# Altium PCB thietkehthongnhung.PcbDoc
Units mil, origin at the board's own origin, x right, y up, seen from the top; angles counter-clockwise.
Board outline 5560 x 3665 mil, 2 copper layers (Top Layer, Bottom Layer); 35 components, 54 nets, 147 pads, 6 vias.
Unrouted connection lines stored in the file: 6.
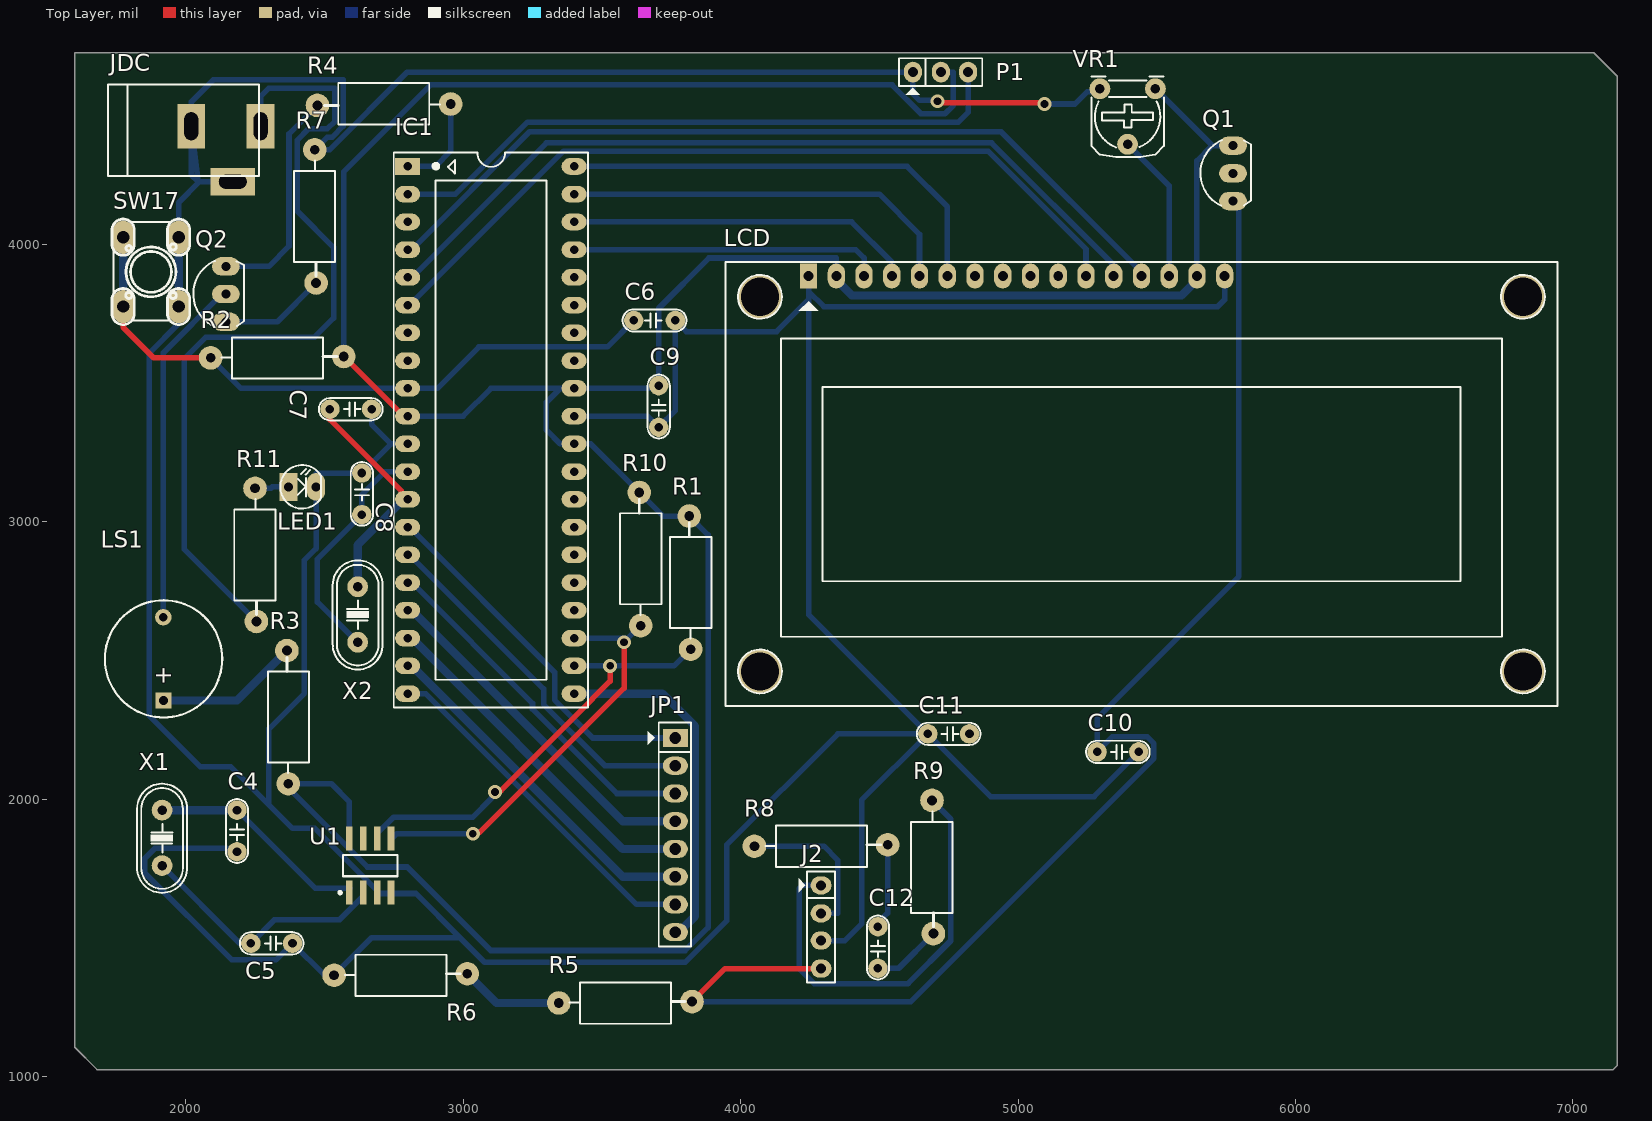
[diagram p0: Top Layer view]
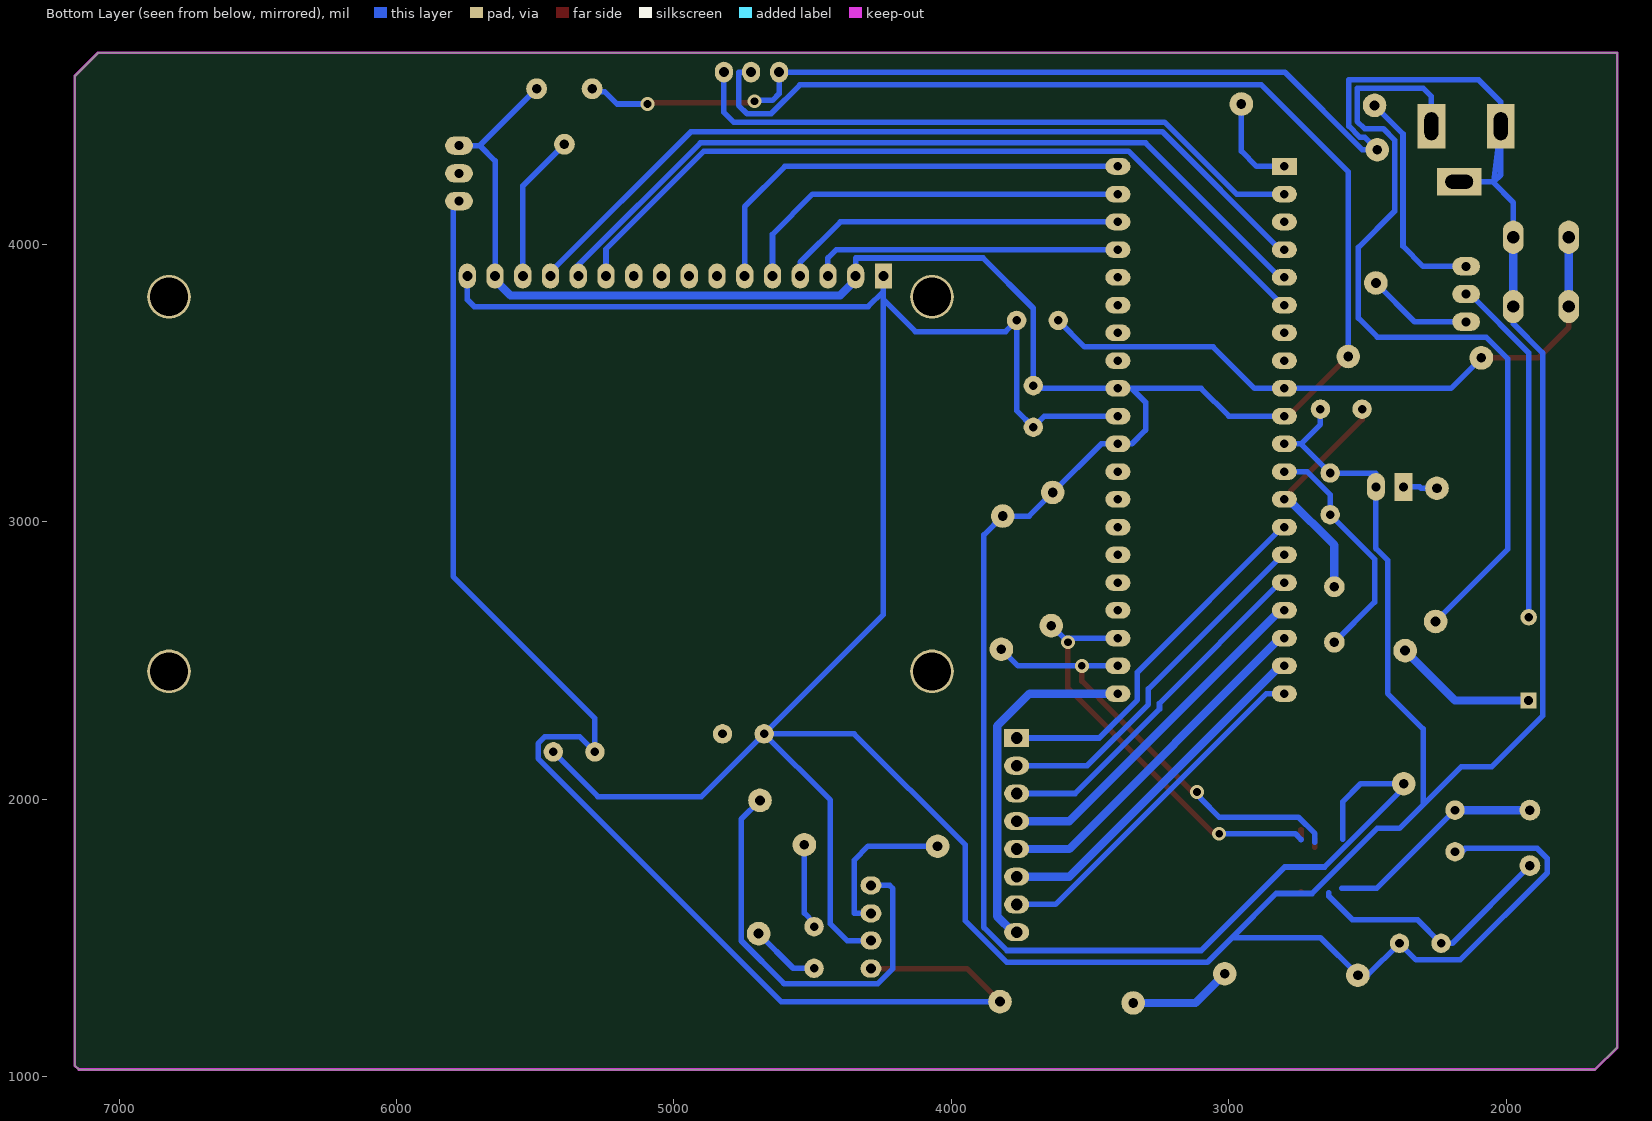
[diagram p1: Bottom Layer view, seen from below]
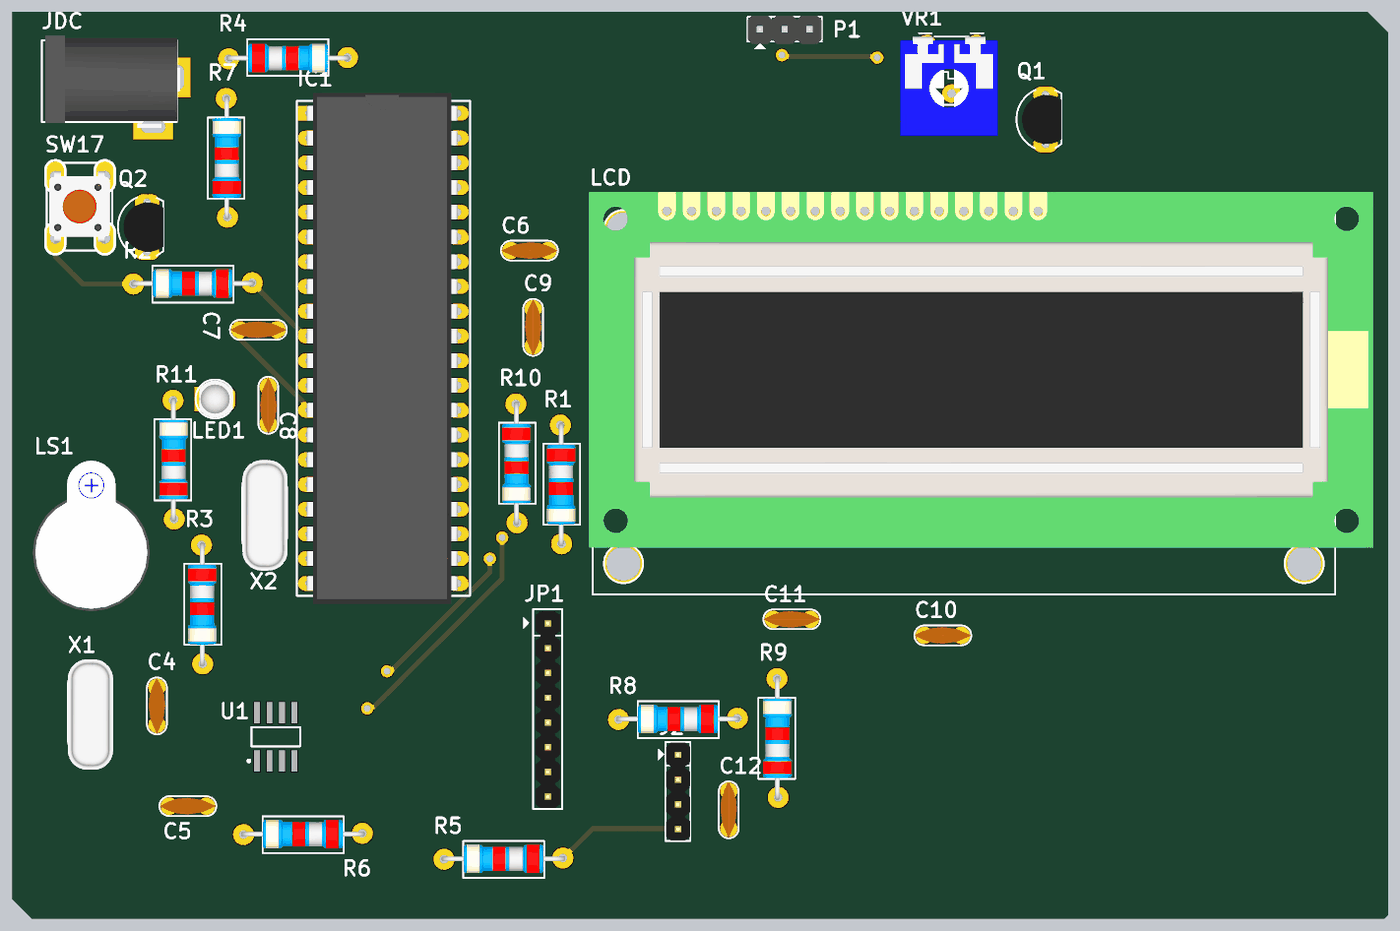
[diagram p2: 3D render of the assembled board from above, using the file's embedded part models]

## Layer stack, top to bottom
Top Solder: solder mask 0.4, Solder Resist, Dk 3.5
Top Layer: signal copper 1.4
Dielectric 1: dielectric 12.6, FR-4, Dk 4.8
Bottom Layer: signal copper 1.4
Bottom Solder: solder mask 0.4, Solder Resist, Dk 3.5

## Board outline
1600,1105 1680,1025 7145,1025 7160,1040 7160,4605 7075,4690 1600,4690

## Design rules (kind name [scope] priority, off if disabled: settings)
Clearance [All] p1: gap=10 ignorepadtopadclearanceinfootprint=FALSE
PolygonConnect [All] p1: connectstyle=Relief reliefconductorwidth=10 reliefentries=4 polygonreliefangle="90 Angle" airgapwidth=10
RoutingVias [All] p1: holewidth=28 width=50 viastyle="Through Hole" minholewidth=28 minwidth=50 maxholewidth=28 maxwidth=50
SolderMaskExpansion [All] p1: expansion=4 istentingtop=FALSE
SupplyNets "Schematic Supply Nets_1" [InNet('VCC')] p1: voltage=0.000
SupplyNets "Schematic Supply Nets" [InNet('GND')] p2: voltage=0.000
Width [All] p1: maxlimit=30 minlimit=20 preferedwidth=20 minimp=50.000000 maximp=50.000000 favimp=50.000000
30 further rules are at their usual default settings.

## Classes and differential pairs
component class Thietkehethongnhung: C4 C5 C6 C7 C8 C9 C10 C11 C12 IC1 J2 JDC JP1 LCD LED1 LS1 P1 Q1 Q2 R2 R3 R4 R5 R7 R8 R9 R11 SW17 U1 X1 X2

## Components (designator, comment, footprint, x,y, rotation, side; value= is the part's Value field where it differs from the comment)
C4 "22p" CN1.5 2185,1810 r90 top value=0.01uF
C5 "22p" CN1.5 2385,1480 r180 top value=0.01uF
C6 "1n" CN1.5 3615,3725 r0 top value=0.01uF
C7 "22p" CN1.5 2670,3405 r180 top value=0.01uF
C8 "22p" CN1.5 2635,3175 r270 top value=0.01uF
C9 "10u" CN1.5 3705,3340 r90 top value=0.01uF
C10 "10uF" CN1.5 5435,2170 r180 top
C11 "0.1uF" CN1.5 4825,2235 r180 top value=33pF
C12 "0.1uF" CN1.5 4495,1390 r90 top value=33pF
IC1 "ATMEL 16A" DIP40/W0.6 2800,4280 r270 top value="Atmega 16L"
J2 "LOADCELL" JP4 4290,1589 r270 top value="Jump Đơn Đực 2.54MM 1x40P Thẳng 11MM"
JDC "Jack DC5.5x2.1" DC-IN 2145,4325 r0 top
JP1 "2.54_8P" JP8 3765,2220 r270 top value="Jump Đơn Đực 2.54MM 1x40P Thẳng 11MM"
LCD "LCD16x2A" LCD16X2 4245,3885 r0 top
LED1 "LED" LED-3 2370,3125 r0 top value="LED 3 ly Single Colour"
LS1 "Speaker" SPEAKER 1920,2355 r90 top
P1 "SERVO90" JP3 4721,4620 r0 top
Q1 "S9015" TO92-123 5775,4255 r90 top value=C9015
Q2 "C458" TO92-123 2145,3820 r90 top value=C1815
R1 "10K" RES-1/2W 3820,2800 r270 top
R2 "10k" RES-1/2W 2350,3590 r180 top
R3 "100" RES-1/2W 2370,2315 r270 top
R4 "1k" RES-1/2W 2695,4505 r0 top
R5 "20K" RES-1/2W 3605,1265 r180 top
R6 "8.2k" RES-1/2W 2795,1365 r180 top
R7 "10K" RES-1/2W 2465,4080 r90 top
R8 "100" RES-1/2W 4310,1830 r180 top
R9 "100" RES-1/2W 4690,1735 r90 top
R10 "10K" RES-1/2W 3640,2885 r270 top
R11 "10k" RES-1/2W 2250,2860 r90 top
SW17 "SW" SW-RST 1775,4025 r90 top value="SW chip 2 pin"
U1 "DS1307ZN+T&R" SOIC-8 2665,1760 r90 top
VR1 "10K" VR 5495,4560 r180 top value="VR 10K"
X1 "32768Khz" XT2 1915,1860 r90 top value=4Mhz
X2 "8Mhz" XT2 2620,2665 r90 top value=4Mhz

## Footprints (in the part's own frame and the unit in brackets; to place one, negate y for a bottom-side part, rotate by r counter-clockwise, add the part's x,y. Pads: shape width x height; smd on the part's side, far side on the other; paste and mask are expansions set on the pad)
CN1.5 [mil]
  round 70 hole 31: 1(0,0) 2(150,0)
  silkscreen extent -40,-40 190,40, body extent -40,-33 190,33, height 235
DC-IN [mil] "Jac DC input"
  rect 100x160 hole 50 slot 100 at 90 deg: 1(125,100) 2(-125,100)
  rect 160x100 hole 50 slot 100 at 0 deg: 3(25,-100)
  silkscreen extent -425,-80 120,250, body extent -410,-105 134,269, height 434
DIP40/W0.6 [mil] "40 PIN, W 600mil, Pin to pin 100mil"
  rect 60x90 hole 31: 1(0,0)
  oval 60x90 hole 31: 2(100,0) 3(200,0) 4(300,0) 5(400,0) 6(500,0) 7(600,0) 8(700,0) 9(800,0) 10(900,0) 11(1000,0) 12(1100,0) 13(1200,0) 14(1300,0) 15(1400,0) 16(1500,0) 17(1600,0) 18(1700,0) 19(1800,0) 20(1900,0) 21(1900,600) 22(1800,600) 23(1700,600) 24(1600,600) 25(1500,600) 26(1400,600) 27(1300,600) 28(1200,600) 29(1100,600) 30(1000,600) 31(900,600) 32(800,600) 33(700,600) 34(600,600) 35(500,600) 36(400,600) 37(300,600) 38(200,600) 39(100,600) 40(0,600)
  silkscreen extent -50,-50 1950,650, body extent -82,-10 1982,600, height 224
JP3 [mil] "Jumper 3"
  oval 65x75 hole 36: 1(-100,0) 2(1,0) 3(99,0)
  silkscreen extent -150,-81 150,50, body extent -150,-60 150,55, height 355
JP4 [mil] "Jumper 4"
  oval 65x75 hole 36: 1(-100,0) 2(1,0) 3(99,0) 4(200,0)
  silkscreen extent -150,-81 250,50, body extent -148,-48 248,50, height 323
JP8 [mil] "JP8"
  rect 65x90 hole 42: 1(0,0)
  oval 65x90 hole 42: 2(100,0) 3(200,0) 4(300,0) 5(400,0) 6(500,0) 7(600,0) 8(700,0)
  silkscreen extent -56,-100 752,57, body extent -48,-50 748,48, height 323
LCD16X2 [mil] "LCD dipslay 16x2, 16 pin"
  rect 62x90 hole 36: 1(0,0)
  oval 62x90 hole 36: 2(100,0) 3(200,0) 4(300,0) 5(400,0) 6(500,0) 7(600,0) 8(700,0) 9(800,0) 10(900,0) 11(1000,0) 12(1100,0) 13(1200,0) 14(1300,0) 15(1400,0) 16(1500,0)
  round 157.48 hole 137.8: "Hole 0"(-175,-1425) "Hole 0"(-175,-75) "Hole 0"(2575,-1425) "Hole 0"(2575,-75)
  silkscreen extent -300,-1550 2700,50, body extent -315,-1360 2855,77, height 414
LED-3 [mil] "LED 2 PIN, 3ly Only colour"
  rect 65x100 hole 32: 1(0,0)
  oval 65x100 hole 32: 2(100,0)
  silkscreen extent -29,-78 118,79, body extent -13,-75 125,75, height 217
RES-1/2W [mil]
  round 85 hole 35: 1(-220,-5) 2(260,0)
  silkscreen extent -195,-74 221,75, body extent -230,-60 270,56, height 121
SOIC-8 [mm] "SOIC, 8-Leads, Body 5,0x4,0mm (max), Pitch 1,27mm, IPC Medium Density"
  rect 2.2x0.6 smd: 1(-2.475,1.905) 2(-2.475,0.635) 3(-2.475,-0.635) 4(-2.475,-1.905) 5(2.475,-1.905) 6(2.475,-0.635) 7(2.475,0.635) 8(2.475,1.905)
  silkscreen extent -2.6,-2.5 0.98,2.88, body extent -3.2,-2.5 3.2,2.5, height 1.75
SPEAKER [mm]
  rect 1.5x1.5 hole 0.8: 1(0,0)
  round 1.5 hole 0.8: 2(7.62,0.013)
  silkscreen extent -1.55,-5.38 9.18,5.36, body extent -2.22,-6 13.24,6, height 4.5
SW-RST [mil]
  oval 120x75 hole 44: 1(-250,0) 1(0,0) 2(-250,-200) 2(0,-200)
  silkscreen extent -315,-240 65,41, body extent -278,-220 34,24, height 276
TO92-123 [mil] "TO-92"
  oval 66x100 hole 32: 1(-100,0) 2(0,0) 3(100,0)
  silkscreen extent -117,-65 120,118, body extent -109,-66 109,95, height 245
VR [mil] "Resistor Variable"
  round 75 hole 35: 1(0,0) 2(100,200) 3(200,0)
  silkscreen extent -31,-44 231,246, body extent -87,-30 307,372, height 165
XT2 [mil] "Footpin for Crystal 2 pin"
  round 75 hole 34: 1(-100,0) 2(100,0)
  silkscreen extent -198,-90 195,90, body extent -233,-93 213,90, height 138

## Part data
C4 C5 C6 C7 C8 C9: library part CN1.5, "Cap np 682pF => 104pF"
C10 C11 C12: library part CN
IC1: library part ATmega16A-PU, "8-Bit AVR Microcontroller with 16K Bytes of In-System Programmable Flash Memory"
J2: library part "Jum Don Duc 2.54_4P", "Cắm", Chung_Loai=Cắm, Don_Vi=Con, Ma_Hang=MH000903
JDC: library part Jac_DC, "Cắm", Chung_Loai=Cắm, Don_Vi=Con, Ma_Hang=MH000923, Ten_Linh_Kien="Jack DC5.5x2.1MM DC5501"
JP1: library part "Jum Don Duc 2.54_8P", "Cắm", Chung_Loai=Cắm, Don_Vi=Con, Ma_Hang=MH000903
LCD: library part LCD16x2, "LCD dipslay 16 char, 2 line"
LED1: "LED Single colour Green and Red"
LS1: "Loudspeaker", LatestRevisionDate=17-Jul-2002, LatestRevisionNote="Re-released for DXP Platform.", PackageReference=PIN2, Published=24-Mar-1999, Publisher="Altium Limited"
P1: library part "Jum Don Duc 2.54_3P", "Cắm", Chung_Loai=Cắm, Don_Vi=Con, Ma_Hang=MH000903, Ten_Linh_Kien="Jump Đơn Đực 2.54MM 1x40P Thẳng 11MM"
Q1: library part S9013, "PNP 600mW, EBC"
Q2: "NPN 600mW, ECB"
R1 R2 R3 R4 R5 R6 R7 R8 R9 R10 R11: library part Res, "Res", Manufacturer="Generic Components", Class=Passive, Published=08/06/2000, Publisher="Altium Hobart Technology Centre", SubClass=R
SW17: library part SW2, "Switch button 2 pin"
U1: "IC RTC CLK/CALENDAR I2C 8-SOIC", Base Part Number=DS1307, Current - Timekeeping (Max)="200µA @ 5V", Manufacturer="Maxim Integrated", Operating Temperature="-40°C ~ 85°C", Package / Case="8-SOIC (0.154\", 3.90mm Width)", Supplier Device Package=8-SOIC, Supplier Part Number 1=DS1307ZN+T&RDKR-ND, Voltage - Supply="4.5 V ~ 5.5 V", Voltage - Supply, Battery="2 V ~ 3.5 V", Category="Integrated Circuits (ICs)", ComponentLink1Description=http://datasheets.maximintegrated.com/en/ds/DS1307.pdf, ComponentLink1URL=http://datasheets.maximintegrated.com/en/ds/DS1307.pdf, Date Format=YY-MM-DD-dd, Features="Leap Year, NVSRAM, Square Wave Output", Interface="I²C, 2-Wire Serial", Manufacturer Part Number=DS1307ZN+T&R, Memory Size=56B, Mounting Type="Surface Mount", Packaging=Digi-Reel®, Part Status=Active, Pricing 1="1=3.6, 10=3.392, 25=2.7132, 50=2.5776, 100=2.3741, 250=2.25196, 500=2.17056 (USD)", RoHS="RoHS Compliant", Stock 1=8457, Supplier 1=Digi-Key, Time Format="HH:MM:SS (12/24 hr)", Type=Clock/Calendar
VR1: library part VR1, "Var Resistor"
X1 X2: library part XT2, "Crystal, 32.768 KHz, -40 to 85 degC, 3.2 x 1.5 x 0.9 mm SMD"

## Via types
v1: diameter 50, hole 28, Top Layer to Bottom Layer, 6 vias

## Nets (pads, with @x,y where several pads share a name; then routed paths per layer and width w, separated by ;. In a path a pad name is that pad's centre, name@x,y a point inside that pad or via, vN(x,y) a via of type N, cw(c..) or ccw(c..) an arc to the next point about the centre after c; other vN are vias at no path point)
GND: C4.1 C5.1 C6.2 C7.1 C8.1 C9.1 C10.1 C11.2 IC1.11 IC1.31 J2.3 JDC.2 JDC.3 LCD.1 LCD.16 LED1.2 P1.1 R6.2 R7.2 SW17.2 U1.4 VR1.3 | length 20441.8
  Top Layer w20: U1.4 U1.4@2740,1665 ; v1(4710,4515) 4715,4510 5090,4510 v1(5095,4505)
  Bottom Layer w20: SW17.2@1975,3775 1975,3713.61 1869,3607.61 1869,2300 2053,2116 2163,2116 2300,1979 ; SW17.2@1975,4025 1975,4150 2050,4225 ; JDC.3 2050,4225 ; C4.1 2159.93,1810 2147.43,1822.5 1889.11,1822.5 1852.5,1785.89 1852.5,1734.11 2166.61,1420 2325,1420 C5.1 2500,1365 R6.2 2670,1500 2989,1500 ; C7.1 2670,3350 2740,3280 ; 2740,1660 2740.5,1659.5 ; IC1.11 2740,3280 ; IC1.31 3665,3380 C9.1 3765,3400 C6.2 3805,3685 4130,3685 4245,3800 ; LCD.1 4245,3830 ; J2.3 4375.96,1490 4435.96,1550 4435.96,1995.96 C11.2 ; v1(4710,4515) 4707,4518 4645,4518 4621,4542 P1.1 2798.66,4620 2518.66,4340 R7.2 2511,4386 2528.5,4386 2567.5,4425 2567.5,4592.5 2100,4592.5 2020,4512.5 JDC.2 ; v1(5095,4505) 5205,4505 5249.77,4549.77 5284.77,4549.77 VR1.3 ; C10.1 5274,2009 4901,2009 C11.2 ; LCD.16 5745,3800 5720,3775 4300,3775 4245,3830 ; JDC.2 2020,4250 2045,4225 ; JDC.2 2045,4225 ; 2045,4225 2050,4225 ; 2300,1979 2385,1894 2465.5,1894 2700,1659.5 2740.5,1659.5 ; 2300,1979 2300,2253 2428,2381 2428,2861 2470,2903 LED1.2 2470,3175 C8.1 2740,3280 ; 2740.5,1659.5 2829.5,1659.5 2989,1500 ; 2989,1500 3078,1411 3800,1411 3951,1562 3951,1835.5 4350.5,2235 C11.2 ; 4245,3800 4245,3830 ; 4245,3800 4245,2665 C11.2
  Bottom Layer w30: SW17.2@1975,3775 SW17.2@1975,4025
NetC4_2: C4.2 U1.1 X1.2 | length 795.2
  Bottom Layer w20: C4.2 2466.4,1678.6 2593.6,1678.6
  Bottom Layer w30: X1.2 C4.2
NetC5_2: C5.2 U1.2 X1.1 | length 924
  Bottom Layer w20: X1.1 2195,1480 C5.2 2320,1565 2555,1565 2640,1650 2640,1662.56
NetC7_2: C7.2 IC1.13 X2.2 | length 841.8
  Top Layer w20: C7.2 2520,3367.78 2777.35,3110.44 2777.35,3098.48 2795.82,3080 IC1.13
  Bottom Layer w30: X2.2 2620,2915 2785,3080 IC1.13
NetC8_2: C8.2 IC1.12 X2.1 | length 857.7
  Bottom Layer w20: X2.1 2475,2710 2475,2865 C8.2 2635,3097 2718,3180 IC1.12
NetC10_2: C10.2 J2.4 Q1.1 R5.1 | length 5051.9
  Top Layer w20: R5.1 3944,1389 J2.4
  Bottom Layer w20: R5.1 4614,1270 5490,2146 5490,2200 5465,2225 5340,2225 C10.2 5285,2291 5796,2802 5796,4155 Q1.1
NetC11_1: C11.1
NetC12_1: C12.1 R9.1 | length 251.8
  Bottom Layer w20: C12.1 4570,1390 R9.1
NetC12_2: C12.2 R8.1 | length 309.5
  Bottom Layer w20: C12.2 4495,1553.53 4530,1588.53 R8.1
NetJ2_1: J2.1 R9.2 | length 1539.1
  Bottom Layer w20: J2.1 4222.5,1689 4210.78,1677.28 4210.78,1388.97 4264.75,1335 4603.39,1335 4757.5,1489.11 4757.5,1927.5 R9.2
NetJ2_2: J2.2 R8.2 | length 572.7
  Bottom Layer w20: R8.2 4300,1830 4350,1780 4350,1588 J2.2
NetJDC_1: JDC.1 R11.1 | length 3019.8
  Bottom Layer w20: R11.1 1994.59,2900.41 1994.59,3586.41 2073.18,3665 2465,3665 2533,3733 2533,3988 2402.5,4118.5 2402.5,4375 2443.5,4416 2511,4416 2537.5,4442.5 2537.5,4562.5 2300,4562.5 2270,4532.5 JDC.1
NetLCD_14: LCD.14 VR1.2 | length 537.1
  Bottom Layer w20: VR1.2 5545,4210 LCD.14
NetLED1_1: LED1.1 R11.2 | length 122.1
  Bottom Layer w20: R11.2 2307,3120 2312,3125 LED1.1
NetLS1_1: LS1.1 R3.1 | length 519.6
  Bottom Layer w30: LS1.1 2185,2355 R3.1
NetLS1_2: LS1.2 Q2.2 | length 1266.7
  Bottom Layer w20: LS1.2 1919.5,3608.61 2130.89,3820 Q2.2
NetQ1_2: Q1.2
NetQ2_1: Q2.1 R7.1 | length 383
  Bottom Layer w20: Q2.1 2330,3720 R7.1
NetQ2_3: Q2.3 R4.1 | length 807.5
  Bottom Layer w20: Q2.3 2300,3920 2372.5,3992.5 2372.5,4397.5 R4.1
NetR5_2: R5.2 R6.1 | length 373.5
  Bottom Layer w30: R6.1 3120,1265 R5.2
PA0: IC1.40 LCD.6 | length 1655.1
  Bottom Layer w20: IC1.40 4600,4280 4745,4135 LCD.6
PA1: IC1.39 LCD.5 | length 1455.1
  Bottom Layer w20: IC1.39 4500,4180 4645,4035 LCD.5
PA2: IC1.38 LCD.4 | length 1255.1
  Bottom Layer w20: IC1.38 4400,4080 4545,3935 LCD.4
PA3: IC1.37 LCD.3 | length 1122.4
  Bottom Layer w20: IC1.37 4415,3980 4445,3950 LCD.3
PA4: IC1.36
PA5: IC1.35
PA6: IC1.34
PA7: IC1.33
PB0: IC1.1 R4.2 | length 347.8
  Bottom Layer w20: IC1.1 2900,4280 2955,4335 R4.2
PB1: IC1.2 P1.3 | length 2287.2
  Bottom Layer w20: IC1.2 2972,4180 3232,4440 4785,4440 4820,4475 P1.3
PB2: IC1.3
PB3: IC1.4 LCD.13 | length 3044.6
  Bottom Layer w20: IC1.4 2815,3980 3240,4405 4939,4405 5445,3899 LCD.13
PB4: IC1.5 LCD.12 | length 2968.1
  Bottom Layer w20: IC1.5 2815,3880 3300,4365 4905,4365 5345,3925 LCD.12
PB5: IC1.6 LCD.11 | length 2918.1
  Bottom Layer w20: IC1.6 2806.88,3780 3361.88,4335 4892,4335 5245,3982 LCD.11
PB6: IC1.7
PB7: IC1.8
PC0: IC1.22 R1.2 U1.6 | length 1635.4
  Top Layer w20: U1.6@2690,1825.95 U1.6 ; v1(3115,2025) 3120.74,2030.74 3136.45,2030.74 3465,2359.29 3465,2360 3530,2425 v1(3530,2480)
  Bottom Layer w20: 2690,1845 2690,1875 2750,1935 3035,1935 3101.11,2001.11 3101.11,2002.99 3115,2016.88 v1(3115,2025) ; IC1.22 v1(3530,2480) 3760,2480 R1.2
PC1: IC1.23 R10.2 U1.5 | length 1542.4
  Top Layer w20: U1.5 U1.5@2740,1888.94 ; v1(3035,1875) 3040.74,1880.74 3060.74,1880.74 3580,2400 v1(3580,2565)
  Bottom Layer w20: 2740,1854.17 2760.83,1875 v1(3035,1875) ; IC1.23 v1@3595,2580 ; v1(3580,2565) v1@3595,2580 ; R10.2 v1@3595,2580
PC2: IC1.24
PC3: IC1.25
PC4: IC1.26
PC5: IC1.27
PC6: IC1.28
PC7: IC1.29
PD0: IC1.14 JP1.1 | length 1338.2
  Bottom Layer w20: IC1.14 2806.88,2980 3330,2456.88 3330,2357.22 3467.22,2220 JP1.1
PD1: IC1.15 JP1.2 | length 1312.9
  Bottom Layer w20: IC1.15 2807.22,2880 3290,2397.22 3290,2340.65 3510.65,2120 JP1.2
PD2: IC1.16 JP1.3 | length 1292.1
  Bottom Layer w20: IC1.16 2815,2780 3250,2345 3250,2324.08 3554.08,2020 JP1.3
PD3: IC1.17 JP1.4 | length 1279.8
  Bottom Layer w30: IC1.17 2815,2680 3575,1920 JP1.4
PD4: IC1.18 JP1.5 | length 1279.8
  Bottom Layer w30: IC1.18 2815,2580 3575,1820 JP1.5
PD5: IC1.19 JP1.6 | length 1279.8
  Bottom Layer w30: IC1.19 2815,2480 3575,1720 JP1.6
PD6: IC1.20 JP1.7 | length 1279.8
  Bottom Layer w20: IC1.20 2865,2380 3625,1620 JP1.7
PD7: IC1.21 JP1.8 | length 1262.7
  Bottom Layer w30: IC1.21 3717.86,2380 3835,2262.86 3835,1577.5 3777.5,1520 JP1.8
RESET: C6.1 IC1.9 R2.2 SW17.1 | length 2357.6
  Top Layer w20: SW17.1@1775,3775 1775,3700 1885,3590 R2.2
  Bottom Layer w20: R2.2 2200,3480 IC1.9 2907,3480 3057,3630 3520,3630 C6.1
  Bottom Layer w30: SW17.1@1775,3775 SW17.1@1775,4025
VCC: C9.2 IC1.10 IC1.30 IC1.32 LCD.2 LCD.15 P1.2 Q1.3 R1.1 R2.1 R3.2 R10.1 U1.8 VR1.1 | length 12285.6
  Top Layer w20: R2.1 2785,3380 IC1.10
  Bottom Layer w20: R2.1 2570,4261 2883,4574 4546,4574 4650,4470 4736.72,4470 4766.72,4500 4766.72,4620 P1.2 ; 2590,1855 2590,1990 2525,2055 R3.2 2370,2040 2655,1755 2798.67,1755 3099.67,1454 3800,1454 3883,1537 3883,2952 R1.1 3720,3020 R10.1 3460,3280 IC1.30 3350,3280 3300,3330 3300,3430 3350,3480 ; IC1.10 3000,3380 3100,3480 3350,3480 ; LCD.2 4345,3950 3886,3950 3705,3769 C9.2 3695,3480 IC1.32 3350,3480 ; VR1.1 5700,4355 ; LCD.15 5645,4300 5700,4355 ; Q1.3 5700,4355
  Bottom Layer w30: LCD.2 4345,3871 4401,3815 5589,3815 5645,3871 LCD.15
pads on no net: "LCD.Hole 0" LCD.7 LCD.8 LCD.9 LCD.10 U1.3 U1.7

## Keep-outs
Bottom Layer:
  the board outline again, w10

## Text inside footprints (layer, text, board x,y; h text height)
LS1: Top Overlay "+" at 1948,2410.5 h60 r90